# Altium PCB PCB.PcbDoc
Units mil, origin at the board's own origin, x right, y up, seen from the top; angles counter-clockwise.
Board outline 6000 x 4000 mil, 2 copper layers (Top Layer, Bottom Layer); 80 components, 61 nets, 328 pads, 44 vias.
Unrouted connection lines stored in the file: 3.
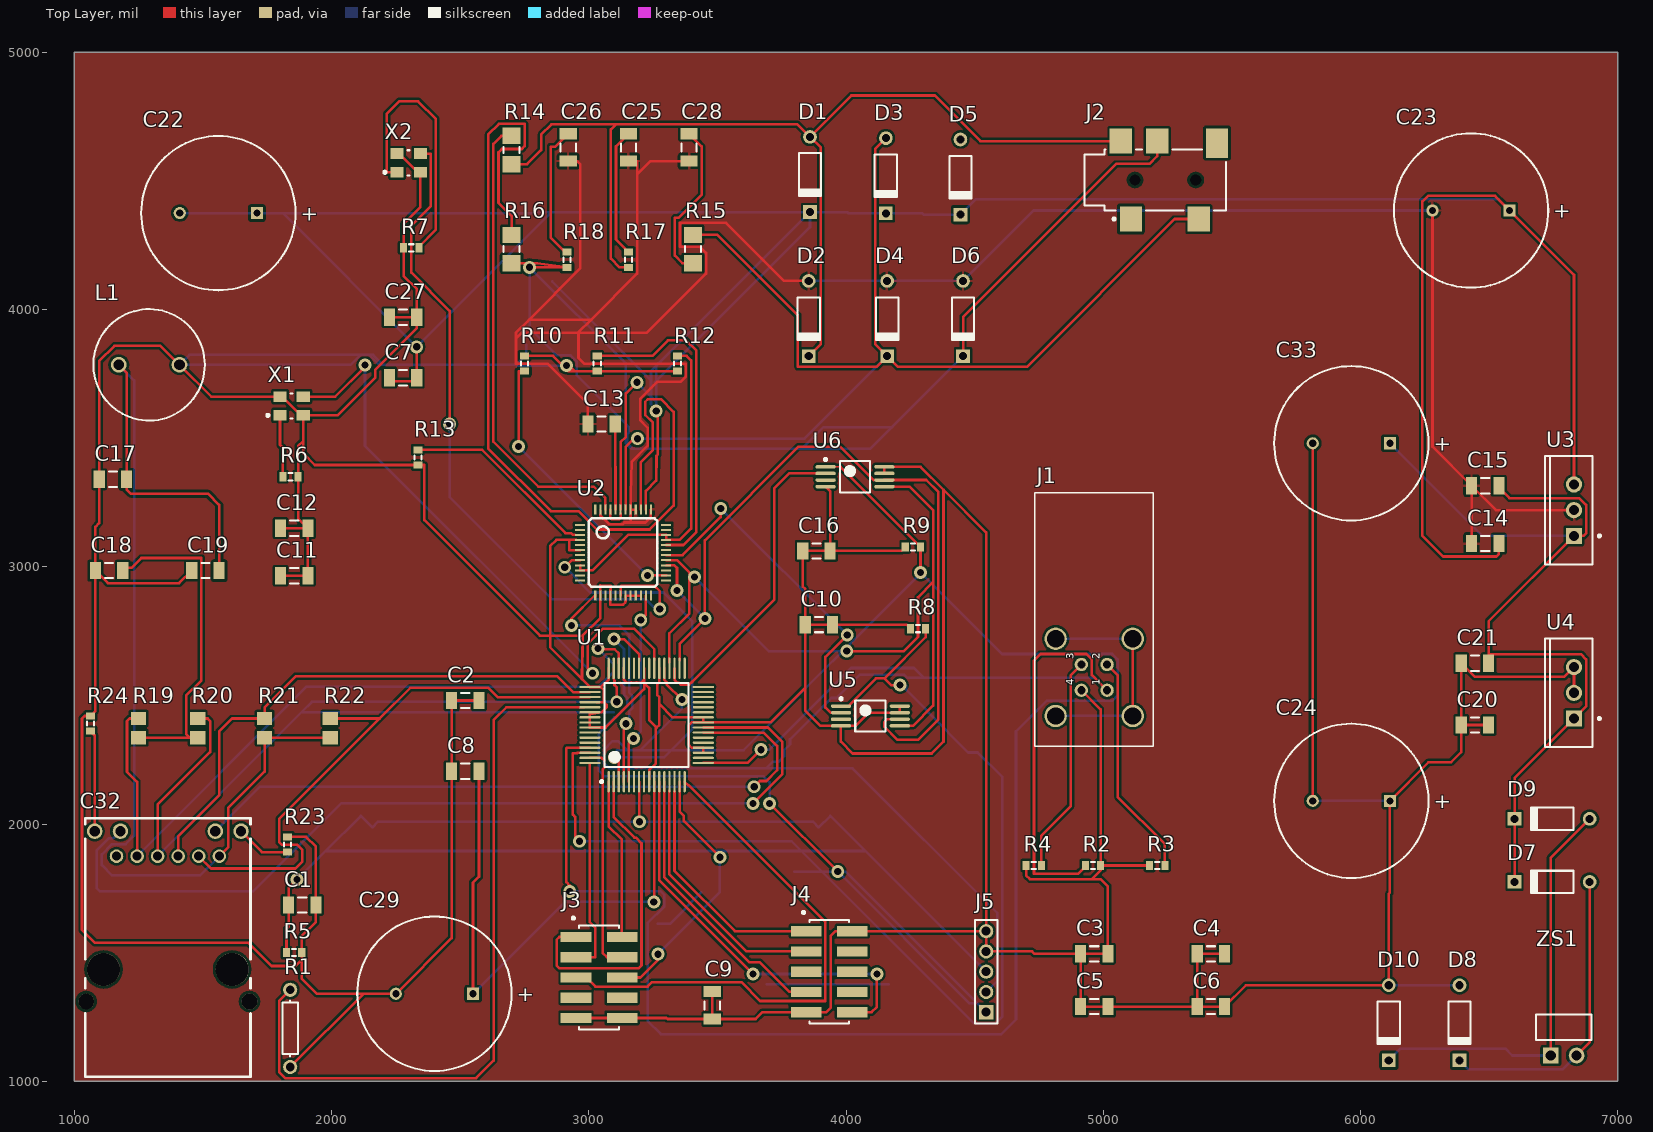
[diagram p0: Top Layer view]
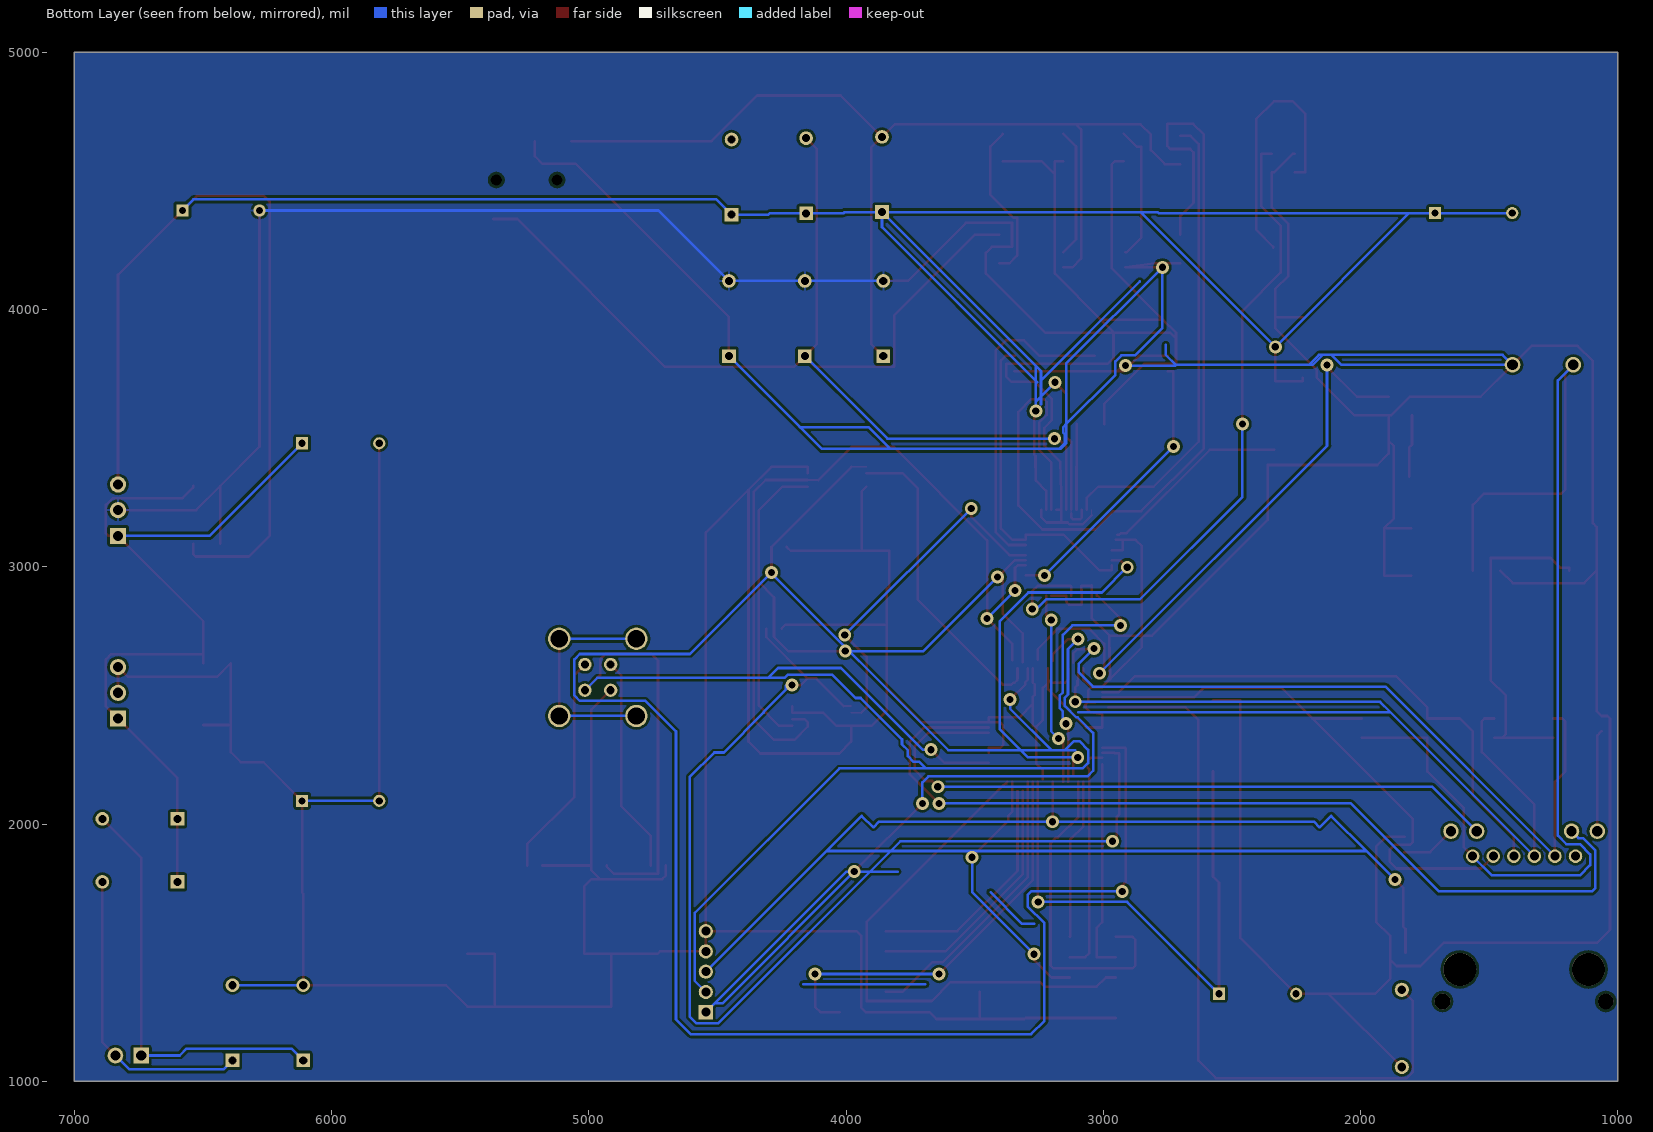
[diagram p1: Bottom Layer view, seen from below]

## Layer stack, top to bottom
Top Solder: solder mask 0.4, Solder Resist, Dk 3.5
Top Layer: signal copper 1.4
Dielectric 1: dielectric 12.6, FR-4, Dk 4.8
Bottom Layer: signal copper 1.4
Bottom Solder: solder mask 0.4, Solder Resist, Dk 3.5

## Board outline
1000,1000 7000,1000 7000,5000 1000,5000

## Design rules (kind name [scope] priority, off if disabled: settings)
Clearance [All] p1: gap=10 ignorepadtopadclearanceinfootprint=FALSE except(0: Arc-Hole Track-Hole SMDPad-Hole THPad-Hole Via-Hole Fill-Hole Poly-Hole Region-Hole Text-Hole)
PolygonConnect [All] p1: connectstyle=Relief reliefconductorwidth=10 reliefentries=4 polygonreliefangle="90 Angle" airgapwidth=10
RoutingVias [All] p1: holewidth=28 width=50 viastyle="Through Hole" minholewidth=28 minwidth=50 maxholewidth=28 maxwidth=50
SMDNeckDown [All] p1: percent=50.000
SolderMaskExpansion [All] p1: expansion=4
Width [All] p1: maxlimit=10 minlimit=10 preferedwidth=10
30 further rules are at their usual default settings.

## Components (designator, comment, footprint, x,y, rotation, side; value= is the part's Value field where it differs from the comment)
C1 "100n" C1206 1886.02,1685 r0 top
C2 "100n" C1206 2520,2480 r0 top
C3 "100n" C1206 4965,1495.22 r0 top
C4 "100n" C1206 5418.51,1495.22 r0 top
C5 "100n" C1206 4965,1290 r0 top
C6 "100n" C1206 5418.51,1290 r0 top
C7 "100n" C1206 2278.35,3735 r0 top
C8 "100n" C1206 2520,2205 r0 top
C9 "100n" C1206 3480,1295 r90 top
C10 "100n" C1206 3895,2775 r0 top
C11 "100n" C1206 1855,2965 r0 top
C12 "100n" C1206 1855,3150 r0 top
C13 "100n" C1206 3050,3555 r0 top
C14 "100n" C1206 6485,3090 r0 top
C15 "100n" C1206 6485,3315 r0 top
C16 "100n" C1206 3885,3061.6 r0 top
C17 "100n" C1206 1150,3340 r0 top
C18 "100n" C1206 1135,2985 r0 top
C19 "100n" C1206 1510,2985 r0 top
C20 "100n" C1206 6445,2385 r0 top
C21 "100n" C1206 6445,2625 r0 top
C22 "10u" RB7.6-15 1560,4375 r0 top
C23 "10u" RB7.6-15 6430,4385 r0 top
C24 "10u" RB7.6-15 5964.58,2090 r0 top
C25 "10n" C1206 3155,4630 r90 top
C26 "10n" C1206 2920,4630 r90 top
C27 "10n" C1206 2278.35,3970 r0 top
C28 "47n" C1206 3390,4630 r90 top
C29 "1u" RB7.6-15 2400,1340 r0 top
C32 "08B0-1X1T-06-F" RJ45 1364.25,1520.35 r180 top
C33 "Cap Pol1" RB7.6-15 5964.58,3480 r0 top value=1000uF
D1 "1N4147" GRZZ0002ZB-A 3860,4525 r90 top
D2 "1N4147" GRZZ0002ZB-A 3855,3965 r90 top
D3 "1N4147" GRZZ0002ZB-A 4155,4520 r90 top
D4 "1N4147" GRZZ0002ZB-A 4160,3965 r90 top
D5 "1N4147" GRZZ0002ZB-A 4445,4515 r90 top
D6 "1N4147" GRZZ0002ZB-A 4455,3965 r90 top
D7 "1N4147" GRZZ0002ZB-A 6745,1775 r0 top
D8 "1N4147" GRZZ0002ZB-A 6385,1227.04 r90 top
D9 "1N4147" GRZZ0002ZB-A 6745,2020 r0 top
D10 "1N4147" GRZZ0002ZB-A 6110,1227.04 r90 top
J1 "KEY" EPC.0B.304.HLNS 4965,2570 r90 top
J2 "HPHONE" PJ-386D 5123.39,4503.43 r0 top
J3 "SD" SMTC-TW-05-07-X-D-500-SM 3040,1403.39 r270 top
J4 "DISP" SMTC-TW-05-07-X-D-500-SM 3935,1425.91 r270 top
J5 "ICSP" SMTC-TW-05-09-X-S-260-100 4545,1268.43 r90 top
L1 "10nH" COIL-RFB1010-2_V 1290.75,3785 r0 top
R1 "2.26K" AXIAL-0.3 1839.25,1205.35 r90 top
R2 "10K" J1-0603 4960,1838.62 r0 top
R3 "10K" J1-0603 5210,1838.62 r0 top
R4 "10K" J1-0603 4730,1838.62 r0 top
R5 "10K" J1-0603 1854.53,1500 r0 top
R6 "10K" J1-0603 1840.47,3350 r0 top
R7 "R5" J1-0603 2309.84,4240 r0 top value=10K
R8 "10K" J1-0603 4280,2759.25 r0 top
R9 "10K" J1-0603 4260,3077.35 r0 top
R10 "10K" J1-0603 2750,3790 r90 top
R11 "10K" J1-0603 3032.91,3790 r90 top
R12 "10K" J1-0603 3345,3790 r90 top
R13 "47K" J1-0603 2335.43,3425 r90 top
R14 "10" 8RB-1206 2700,4620.09 r90 top
R15 "10" 8RB-1206 3405,4235 r90 top
R16 "10" 8RB-1206 2700,4235 r90 top
R17 "20" J1-0603 3155,4193.6 r90 top
R18 "20" J1-0603 2915,4193.6 r90 top
R19 "49.9" 6-0805 1250,2372.6 r90 top
R20 "49.9" 6-0805 1479.67,2372.6 r90 top
R21 "49.9" 6-0805 1740,2372.6 r90 top
R22 "49.9" 6-0805 1995,2372.6 r90 top
R23 "R5" J1-0603 1828.94,1920.47 r90 top value=220
R24 "R5" J1-0603 1062.91,2390.38 r90 top value=220
U1 "PIC18F67J60" TQFP-PT64_M 3225,2385 r90 top
U2 "VS1011" LQFP-48 3133.46,3055 r270 top
U3 "LM2937" NDE0003A 6830,3220 r90 top
U4 "LM2937" NDE0003A 6830,2510 r90 top
U5 "23K256" TSSOP-ST8_M 4095,2420 r0 top
U6 "23K256" TSSOP-ST8_M 4035,3350 r0 top
X1 "25Mhz" AVX-CX3225GB-4_V 1845,3625 r0 top
X2 "24Mhz" AVX-CX3225GB-4_V 2300,4570 r0 top
ZS1 "" SMTC-TSW-102-08-X-S-RA 6740,1100 r0 top

## Footprints (in the part's own frame and the unit in brackets; to place one, negate y for a bottom-side part, rotate by r counter-clockwise, add the part's x,y. Pads: shape width x height; smd on the part's side, far side on the other; paste and mask are expansions set on the pad)
6-0805 [mm] "Chip Resistor; Body 2 x 1.2 mm (LxW typ)"
  rect 1.3x1.5 smd: 1(-0.95,0) 2(0.95,0)
8RB-1206 [mm] "Chip Resistor; Body 3.2 x 1.6 mm (LxW typ)"
  rect 1.6x1.8 smd: 1(-1.4,0) 2(1.4,0)
  silkscreen extent -0.3,-0.8 0.3,0.8
AVX-CX3225GB-4_V [mm] "SMD, 4-Leads, Body 3.2x2.5mm, Height 0.9mm"
  rect 1.3x1.05 smd: 1(-1.15,-0.925) 2(1.15,-0.925) 3(1.15,0.925) 4(-1.15,0.925)
  silkscreen extent -2.47,-1.25 0.1,1.25, body extent -1.6,-1.25 1.6,1.25, height 0.9
AXIAL-0.3 [mm] "Axial Device, Thru-Hole; 2 Leads; 0.3 in Pin Spacing"
  round 1.4 hole 0.85: 1(-3.81,0) 2(3.81,0)
  silkscreen extent -2.77,-0.76 2.77,0.76
C1206 [mm] "Chip Capacitor, Body 3.2x1.6mm, IPC High Density"
  rect 1.1x1.7 smd: 1(-1.35,0) 2(1.35,0)
  silkscreen extent -0.4,-0.75 0.4,0.75, body extent -1.7,-0.9 1.7,0.9, height 1.3
COIL-RFB1010-2_V [mm] "Radial Leaded, 2-Leads, Dia 11mm, Height 11.5mm, Pin Spacing 6mm"
  round 1.55 hole 1.05: 1(-3,0) 2(3,0)
  Mechanical 13 keep-out circle w0.1: c0,0 r5.5
  silkscreen extent -5.5,-5.5 5.5,5.5, body extent -5.5,-5.5 5.5,5.5, height 11.5
EPC.0B.304.HLNS [mil] "Socket, Female, Height 11.7 mm, Through hole"
  round 52 hole 32: 1(-50,-50) 2(50,-50) 3(50,50) 4(-50,50)
  round 87 hole 67: 6(-150,-150) 7(150,-150) 8(150,150) 9(-150,150)
  silkscreen extent -268,-230 717,231, body extent -259,-230 725,230, height 500
GRZZ0002ZB-A [mm] "Diode, Axial; Body 4.2 x 2.2 mm (LxDia. max), Lead Dia. 0.5 mm (nom)"
  rect 1.35x1.35 hole 0.8: 1(-3.71,0)
  round 1.35 hole 0.8: 2(3.71,0)
  silkscreen extent -2.2,-1.1 2.1,1.1, body extent -2.1,-1.1 2.1,1.1, height 2.2
J1-0603 [mm] "Chip Resistor, Body 1.6x0.8mm, IPC High Density"
  rect 0.7x0.9 smd: 1(-0.75,0) 2(0.75,0)
  silkscreen extent -0.2,-0.35 0.2,0.35, body extent -0.85,-0.48 0.85,0.48, height 0.9
LQFP-48 [mm]
  rect 0.2x1 smd paste-25.4 mask-25.4: 1(-2.75,-4.25) 2(-2.25,-4.25) 3(-1.75,-4.25) 4(-1.25,-4.25) 5(-0.75,-4.25) 6(-0.25,-4.25) 7(0.25,-4.25) 8(0.75,-4.25) 9(1.25,-4.25) 10(1.75,-4.25) 11(2.25,-4.25) 12(2.75,-4.25) 25(2.75,4.25) 26(2.25,4.25) 27(1.75,4.25) 28(1.25,4.25) 29(0.75,4.25) 30(0.25,4.25) 31(-0.25,4.25) 33(-1.25,4.25) 34(-1.75,4.25) 35(-2.25,4.25) 36(-2.75,4.25)
  rect 1x0.2 smd paste-25.4 mask-25.4: 13(4.25,-2.75) 14(4.25,-2.25) 15(4.25,-1.75) 16(4.25,-1.25) 17(4.25,-0.75) 18(4.25,-0.25) 19(4.25,0.25) 20(4.25,0.75) 21(4.25,1.25) 22(4.25,1.75) 23(4.25,2.25) 24(4.25,2.75) 37(-4.25,2.75) 38(-4.25,2.25) 39(-4.25,1.75) 40(-4.25,1.25) 41(-4.25,0.75) 42(-4.25,0.25) 43(-4.25,-0.25) 44(-4.25,-0.75) 45(-4.25,-1.25) 46(-4.25,-1.75) 47(-4.25,-2.25) 48(-4.25,-2.75)
  rect 0.2x1 smd mask-25.4: 32(-0.75,4.25)
  silkscreen extent -3.37,-3.38 3.37,3.37
NDE0003A [mm] "FM, 3-Leads, Body 10.7x4.7mm, Pitch 2.54mm"
  rect 1.6x1.6 hole 1: 1(-2.54,0)
  round 1.6 hole 1: 2(0,0) 3(2.54,0)
  silkscreen extent -5.35,-2.63 5.35,2.85, body extent -5.4,-1.9 5.4,2.9, height 19.4
PJ-386D [mm] "Phone Jack, Right Angle, SM, Body 14x6x4.8mm (LxWxH)"
  rect 2.2x2.5 smd: 1(-0.4,-3.85) 2(6.3,-3.85) 3(2.2,3.85) 4(-1.4,3.85)
  rect 2.2x2.9 smd: 10(8.1,3.65)
  round 0.8 hole 1.1 unplated: MH1(0,0) MH2(6,0)
  silkscreen extent -5,-3.97 9,3, body extent -5,-3 9,3, height 4.87
RB7.6-15 [mm] "Polarized Capacitor (Radial); 2 Leads"
  rect 1.2x1.2 hole 0.7: 1(3.81,0)
  round 1.2 hole 0.7: 2(-3.81,0)
  silkscreen extent -7.62,-7.62 7.62,7.62
RJ45 [mm]
  round 1.335 hole 0.89: 1(-5.065,-9) 2(-3.035,-9) 3(-1.005,-9) 4(1.025,-9) 5(3.055,-9) 6(5.085,-9)
  round 1.53 hole 1.02: 7(-7.215,-11.47) 8(-4.675,-11.47) 9(4.695,-11.47) 10(7.235,-11.47)
  round 1.57 hole 1.57 unplated: ""(-8.045,5.34)
  round 3.25 hole 3.25 unplated: ""(-6.335,2.17) ""(6.365,2.17)
  round 1.524 hole 1.57 unplated: ""(8.075,5.34)
  silkscreen extent -8.15,-12.77 8.16,12.76, body extent -8.27,-12.9 8.3,12.9, height 13.42
SMTC-TSW-102-08-X-S-RA [mm] ".025 SQ Post Terminal Strip Assembly, 1x2 Pins, Right Angle, 2.54mm Pitch, Male"
  rect 1.55x1.55 hole 1.02: 1(0,0)
  round 1.55 hole 1.02: 2(2.54,0)
  silkscreen extent -1.46,1.52 4,4.06, body extent -1.27,-0.32 3.81,9.9, height 3.05
SMTC-TW-05-07-X-D-500-SM [mm] "SMT Board Stacking Terminal Strip ASM, 2x5 Pins, Vertical, 2mm Pitch, Male"
  rect 1.02x3.025 smd: 1(-4,-2.272) 2(-4,2.272) 3(-2,-2.272) 4(-2,2.272) 5(0,-2.272) 6(0,2.272) 7(2,-2.272) 8(2,2.272) 9(4,-2.272) 10(4,2.272)
  silkscreen extent -5.98,-2.66 5.12,1.97, body extent -5,-3.37 5,3.37, height 17.35
SMTC-TW-05-09-X-S-260-100 [mm] "Terminal Strip, 1x5 Pins, Vertical, 2mm Pitch, Male"
  rect 1.4x1.4 hole 0.89: 1(0,0)
  round 1.4 hole 0.89: 2(2,0) 3(4,0) 4(6,0) 5(8,0)
  silkscreen extent -1.13,-1.1 9.13,1.1, body extent -1,-0.99 9,0.99, height 9.04
TQFP-PT64_M [mm] "Thin QFP, 64-Leads, Body 10x10mm, Pitch 0.5mm, IPC Low Density"
  oval 2.1x0.224 smd: 1(-5.6,3.75) 2(-5.6,3.25) 3(-5.6,2.75) 4(-5.6,2.25) 5(-5.6,1.75) 6(-5.6,1.25) 7(-5.6,0.75) 8(-5.6,0.25) 9(-5.6,-0.25) 10(-5.6,-0.75) 11(-5.6,-1.25) 12(-5.6,-1.75) 13(-5.6,-2.25) 14(-5.6,-2.75) 15(-5.6,-3.25) 16(-5.6,-3.75) 33(5.6,-3.75) 34(5.6,-3.25) 35(5.6,-2.75) 36(5.6,-2.25) 37(5.6,-1.75) 38(5.6,-1.25) 39(5.6,-0.75) 40(5.6,-0.25) 41(5.6,0.25) 42(5.6,0.75) 43(5.6,1.25) 44(5.6,1.75) 45(5.6,2.25) 46(5.6,2.75) 47(5.6,3.25) 48(5.6,3.75)
  oval 0.224x2.1 smd: 17(-3.75,-5.6) 18(-3.25,-5.6) 19(-2.75,-5.6) 20(-2.25,-5.6) 21(-1.75,-5.6) 22(-1.25,-5.6) 23(-0.75,-5.6) 24(-0.25,-5.6) 25(0.25,-5.6) 26(0.75,-5.6) 27(1.25,-5.6) 28(1.75,-5.6) 29(2.25,-5.6) 30(2.75,-5.6) 31(3.25,-5.6) 32(3.75,-5.6) 49(3.75,5.6) 50(3.25,5.6) 51(2.75,5.6) 52(2.25,5.6) 53(1.75,5.6) 54(1.25,5.6) 55(0.75,5.6) 56(0.25,5.6) 57(-0.25,5.6) 58(-0.75,5.6) 59(-1.25,5.6) 60(-1.75,5.6) 61(-2.25,5.6) 62(-2.75,5.6) 63(-3.25,5.6) 64(-3.75,5.6)
  silkscreen extent -5.72,-4.15 4.15,4.57, body extent -5,-5 5,5, height 1.6
TSSOP-ST8_M [mm] "TSOP, 8-Leads, Body 3x4.4mm, Pitch 0.65mm, IPC Low Density"
  oval 2x0.35 smd: 1(-2.9,0.975) 2(-2.9,0.325) 3(-2.9,-0.325) 4(-2.9,-0.975) 5(2.9,-0.975) 6(2.9,-0.325) 7(2.9,0.325) 8(2.9,0.975)
  silkscreen extent -3.02,-1.55 1.5,1.82, body extent -2.25,-1.55 2.25,1.55, height 1.2

## Part data
C1 C2 C3 C4 C5 C6 C7 C8 C9 C10 C11 C12 C13 C14 C15 C16 C17 C18 C19 C20 C21 C25 C26 C27 C28: library part "Cap Semi", "Capacitor (Semiconductor SIM Model)", LatestRevisionDate=29-May-2009, LatestRevisionNote="IPC-7351 Footprint Added.", PackageDescription="Chip Capacitor", PackageReference=C1206, Published=8-Jun-2000, Publisher="Altium Limited"
C22 C23 C24 C29: library part "Cap Pol1", "Polarized Capacitor (Radial)", LatestRevisionDate=17-Jul-2002, LatestRevisionNote="Re-released for DXP Platform.", PackageDescription="Polarized Capacitor (Radial); 2 Leads", PackageReference=RB7.6-15, Published=8-Jun-2000, Publisher="Altium Limited"
C32: Supplier Part Number 1=507-1445-ND, HELPURL=http://belfuse.com/pdfs/08B0-1X1T-06-F.pdf, Supplier 1=Digikey
C33: "Polarized Capacitor (Radial)", LatestRevisionDate=17-Jul-2002, LatestRevisionNote="Re-released for DXP Platform.", PackageDescription="Polarized Capacitor (Radial); 2 Leads", PackageReference=RB7.6-15, Published=8-Jun-2000, Publisher="Altium Limited"
D1 D2 D3 D4 D5 D6 D7 D8 D9 D10: library part 1N4148, "Silicon Epitaxial Planar Diode for Various Detector, Modulator, Demodulator", Code_JEITA=SC-40, ComponentLink1Description="Manufacturer Link", ComponentLink1URL=http://sg.renesas.com/fmwk.jsp?cnt=diode_landing.jsp&fp=/products/discrete/diodes/, ComponentLink2Description=Datasheet, ComponentLink2URL=http://documentation.renesas.com/eng/products/diode/rej03g0556_1n4148.pdf, ComponentLink3Description="Packaging Specification", ComponentLink3URL=http://sg.renesas.com/media/products/common_info/package/pdf/diode/code/grzz0002zb_a.pdf, DatasheetVersion="Rev.5.00, Jul-2006", PackageDescription="Diode, Axial; Body 4.2 x 2.0 mm (LxDia.), Lead Dia. 0.5 mm (nom)", PackageReference=GRZZ0002ZB-A, PackageVersion=Aug-2005, Published=12-Feb-2010, Publisher="Altium Limited"
J1: library part CMP-1505-00274-1, "Elbow receptacle for printed circuit (solder or screw fixing), Key (C), 0B series, Multipole Type with 4 Contacts", Manufacturer=LEMO, PartNumber=EPC.0B.304.HLNS, Rated Current(A)=6, AWG=24, ComponentLink1Description="Manufacturer URL", ComponentLink1URL=http://www.lemo.com, ComponentLink2Description=Datasheet, ComponentLink2URL=http://intra.lemo.ch/catalog/ROW/UK_English/unipole_multipole.pdf, Contact Diameter="0.7 mm", DatasheetVersion=Jun-14, Number of contacts=4, PackageDescription="Elbow receptacle for printed circuit (solder or screw fixing), Key(C) for Printed Circuit", PackageReference=EPC.0B.304.HLNS
J2: library part TSH-3864D, "Phone Jack, PJ-386D Series, Right Angle, SM, 4-Conductor Open Circuit", ComponentLink1Description="Manufacturer Link", ComponentLink1URL=http://www.contactswitch.com/, ComponentLink2Description=Datasheet, ComponentLink2URL=http://www.contactswitch.com/uploads/product/pdf_file_193.pdf, DatasheetVersion="revA, 2006", DrillSize="Corresponds to nominal value.", PackageDescription="PJ-386D Series Phone Jack, Right Angle, SM, Body 14 x 6 x 4.8 mm (LxWxH)", PackageReference=PJ-386D, PackageVersion="revA, 2006", PCB_Layout="Complies with manufacturer's recommendation.", Published=30-May-2008, Publisher="Altium Limited"
J3 J4: library part CMP-1029-00393-1, "SMT Board Stacker, Vertical, -55 to 125 degC, 2 mm Pitch, 10-Pin, Male, RoHS", Manufacturer=Samtec, PartNumber=TW-05-07-F-D-500-SM, Temperature Range="-55 to 125 degC", ComponentLink1Description="Manufacturer URL", ComponentLink1URL=http://www.samtec.com, ComponentLink2Description=Datasheet, ComponentLink2URL=http://d2a072wq521u33.cloudfront.net/catalog_english//TW_SM.PDF, ComponentLink3Description="Package Specification", ComponentLink3URL=http://www.samtec.com/documents/webfiles/cpdf/TW-XX-XX-XXX-X-XXX-SM-XXX-XX-MKT1.pdf, DatasheetVersion=F-214, Mounting Technology="Surface Mount", Orientation=Vertical, PackageDescription="High Temp 2mm SMT Board Stacking Terminal Strip ASM", PackageReference=TW-05-07-X-D-500-SM, PackageVersion="CL, 3/1993", Pitch="2 mm", RoHS=True
J5: library part CMP-1029-00402-1, "Through-Hole Board Stacker, Vertical, -55 to 125 degC, 2 mm Pitch, 5-Pin, Male, RoHS", Manufacturer=Samtec, PartNumber=TW-05-09-F-S-260-100, Temperature Range="-55 to 125 degC", ComponentLink1Description="Manufacturer URL", ComponentLink1URL=http://www.samtec.com, ComponentLink2Description=Datasheet, ComponentLink2URL=http://d2a072wq521u33.cloudfront.net/catalog_english//TW_TH.PDF, ComponentLink3Description="Package Specification", ComponentLink3URL=http://www.samtec.com/documents/webfiles/cpdf/TW-XX-XX-X-X-XXX-XXX-XXX-XX-MKT2.pdf, DatasheetVersion=F-214, Mounting Technology=Through-hole, Orientation=Vertical, PackageDescription="High Temp 2mm Terminal Strip(Board Stacking)", PackageReference=TW-05-09-X-S-260-100, PackageVersion="BF, 6/1998", Pitch="2 mm", RoHS=True
L1: library part CMP-0899-00020-1, "Power Inductor, 56 uH +/- 10%, 2.6 A, -40 to 125 degC, 2-Pin Radial Leaded, Dia 11 mm, RoHS, Tray", Ambient Temperature Range="-40 to 125 degC", Inductance="56 uH", Manufacturer=Coilcraft, PartNumber=RFB1010-560L, Tolerance=10%, ComponentLink1Description="Manufacturer URL", ComponentLink1URL=http://www.coilcraft.com/, ComponentLink2Description=Datasheet, ComponentLink2URL=http://www.coilcraft.com/pdfs/rfb.pdf, DatasheetVersion=Sep-13, DCR="0.09 Ohm Max.", Irms="3.2 A @40 degC", Isat="2.6 A", Mounting Technology="Through Hole", PackageDescription="2-Pin Radial Leaded, Dia 11 mm, Height 11.5 mm, Radial 6 mm", PackageReference=RFB1010-2, Packing=Tray, RoHS=TRUE, SRF="8.6 MHz"
R1: library part Res1, "Resistor", LatestRevisionDate=17-Jul-2002, LatestRevisionNote="Re-released for DXP Platform.", PackageDescription="Axial Device, Thru-Hole; 2 Leads; 0.3 in Pin Spacing", PackageReference=AXIAL-0.3, Published=8-Jun-2000, Publisher="Altium Limited"
R2 R3 R4 R5 R6 R7 R8 R9 R10 R11 R12 R13 R17 R18 R23 R24: library part Res3, "Resistor", LatestRevisionDate=29-May-2009, LatestRevisionNote="IPC-7351 Footprint Added.", PackageDescription="Chip Resistor", PackageReference=J1-0603, Published=8-Jun-2000, Publisher="Altium Limited"
R14 R15 R16: library part ERJ8BQ, "Low Ohmic Value Thick Film Chip Resistor, 0.22 Ohm to 9.1 Ohm Range, 1%, 2% and 5% Tolerance, 1206 Size, 0.33 W", PackageDocument=Mar-2003, Code_IPC="3216 [1206]", ComponentLink1Description="Manufacturer Link", ComponentLink1URL=http://www.panasonic.com/industrial/components/resistive_products.htm, ComponentLink2Description=Datasheet, ComponentLink2URL=http://www.panasonic.com/industrial/components/pdf/AOA0000CE3.pdf, LatestRevisionDate=19-Mar-2004, LatestRevisionNote="Silkscreen size reduced.", PackageReference=8RB-1206, Published=17-Dec-2003, Publisher="Altium Limited"
R19 R20 R21 R22: library part ERJ6BQ, "Low Ohmic Value Thick Film Chip Resistor, 0.22 Ohm to 9.1 Ohm Range, 1%, 2% and 5% Tolerance, 0805 Size, 0.25 W", PackageDocument=Mar-2003, Code_IPC="2012 [0805]", ComponentLink1Description="Manufacturer Link", ComponentLink1URL=http://www.panasonic.com/industrial/components/resistive_products.htm, ComponentLink2Description=Datasheet, ComponentLink2URL=http://www.panasonic.com/industrial/components/pdf/AOA0000CE3.pdf, LatestRevisionDate=19-Mar-2004, LatestRevisionNote="Silkscreen size reduced.", PackageReference=6-0805, Published=17-Dec-2003, Publisher="Altium Limited"
U1: library part CMP-0116-00618-1, "High Performance, 1-Mbit Flash Microcontroller with Ethernet, 128K Flash, 64-Pin TQFP, Industrial Temperature Range, Tape and Reel", Code_JEDEC=MS-026, DatasheetVersion="revE, Oct-2009", PackageDescription="64-Lead Thin Plastic Quad Flat Pack (PT) - 10x10x1mm Body, 2.00mm [TQFP]", PackageReference=TQFP-PT64, PackageVersion="revBB, Aug-2009"
U3 U4: library part CMP-0062-02520-3, "400mA and 500mA Voltage Regulator, 3-pin TO-220, Pb-Free", Manufacturer="Texas Instruments", PackageTopMarking=NSUZXYTTE#*LM2937ET*-3.3, PowerWise=N, ComponentLink1Description="Datasheet URL", ComponentLink1URL=http://www.ti.com/general/docs/lit/getliterature.tsp?genericPartNumber=LM2937-3.3&fileType=pdf, CompType="LDO IC", PackageDescription="TO-220, Molded, 3 Lead, Straight", PackageReference=NDE0003A, PinCount=3, RoHS=Y
U5 U6: library part CMP-0163-00021-1, "256K, 32768x8-bit, 3.6V SPI Serial SRAM, 8-Pin TSSOP, Extended TemperatureTape and Reel", Code_JEDEC=MO-153, DatasheetVersion="revD, Apr-2009", PackageDescription="8-Lead Plastic Thin Shrink Small Outline (ST) - 4.4mm Body [TSSOP]", PackageReference=TSSOP-ST8, PackageVersion="revBB, Aug-2009"
X1 X2: library part CMP-0614-00001-1, "Crystal Unit, 8 pF, 25000 kHz, -10 to 70 degC, 4-Pin 3.2 x 2.5 x 0.8 mm SMD, RoHS, Tape and Reel", Frequency="25000 kHz", Frequency Tolerance="+/- 20 x 10^(-6)", Load Capacitance="8 pF", Manufacturer=Kyocera, Operationg Temperature="-10 to 70 degC", PartNumber=CX3225GB25000D0HEQCC, ComponentLink1Description="Manufacturer URL", ComponentLink1URL=http://global.kyocera.com/, ComponentLink2Description=Datasheet, ComponentLink2URL=http://global.kyocera.com/prdct/electro/pdf/xtal/cx3225gb_cs_e.pdf, ComponentLink3Description="Package Specification", ComponentLink3URL=http://global.kyocera.com/prdct/electro/pdf/xtal/cx3225gb_cs_e.pdf, DatasheetVersion=Sep-13, Mounting Technology="Surface Mount", PackageDescription="4-Pin SMT, Body 3.2 x 2.5 mm, Height 0.9 mm", PackageReference=CX3225GB-4, PackageVersion=Sep-13, Packing="Tape and Reel", RoHS=TRUE, Series=CX3225GB
ZS1: library part CMP-1024-00320-1, Manufacturer=Samtec, PartNumber=TSW-102-08-G-S-RA, Temperature Range="-55 to 125 degC", ComponentLink1Description="Manufacturer URL", ComponentLink1URL=http://www.samtec.com, ComponentLink2Description=Datasheet, ComponentLink2URL=http://www.samtec.com/documents/webfiles/pdf/TSW_TH.PDF, ComponentLink3Description="Package Specification", ComponentLink3URL=http://www.samtec.com/documents/webfiles/cpdf/TSW-XXX-XX-XXX-X-XX-XXX-MKT.pdf, DatasheetVersion=F-214, Mounting Technology=Through-hole, Orientation="Right Angle", PackageDescription=".025[0.64] SQ. Post Terminal Strip Assembly", PackageReference=TSW-102-08-X-S-RA, PackageVersion="DM, 8/1988", Pitch="2.54 mm", RoHS=True
U2: HELPURL=http://www.vlsi.fi/fileadmin/datasheets/vs1011.pdf

## Via types
v1: diameter 50, hole 28, Top Layer to Bottom Layer, 44 vias

## Nets (pads, with @x,y where several pads share a name; then routed paths per layer and width w, separated by ;. In a path a pad name is that pad's centre, name@x,y a point inside that pad or via, vN(x,y) a via of type N, cw(c..) or ccw(c..) an arc to the next point about the centre after c; other vN are vias at no path point)
+3.3VA: C7.1 C7.2 C14.2 C22.1 C22.2 C23.1 D1.1 D3.1 D5.1 U2.38 U2.43 U2.45 U3.3 | length 13490.8
  Top Layer w3.94: U2.43@3123.62,3207 U2.43
  Top Layer w10: C7.1 2225.2,3720.91 2331.5,3720.91 C7.2 2331.5,3854.5 v1(2331,3855) ; U2.45 3084.25,3189.75 3089.03,3184.97 3117.92,3184.97 3123.62,3190.67 U2.43@3123.62,3207 ; U2.43 3123.62,3484.35 3144,3504.73 3144,3674 v1(3187,3717) ; U2.38 3222.05,3295.4 3262,3335.35 ; v1(3262,3605.35) 3269,3598.35 3269,3436.84 3264,3431.84 ; C14.2 6538.15,3050 6528.15,3040 6321,3040 6241,3120 6241,4420 6263,4442 6523,4442 C23.1 6830,4135 U3.3 ; 3262,3335.35 3264,3431.84 ; 3262,3335.35 3262,3429.84 3264,3431.84
  Bottom Layer w10: C22.2 C22.1 1811,4375 ; v1(3187,3717) 3242,3662 ; 3242,3632 3242,3662 ; 3257,3717 3262,3722 ; v1(3262,3605.35) 3262,3642 ; C23.1 6537,4428 4504.06,4428 D5.1 4302,4368.94 4297,4373.94 D3.1 4010,4373.94 4005,4378.94 D1.1 ; 1811,4375 v1(2331,3855) 2854.94,4378.94 ; 1811,4375 2785,4375 2788.94,4378.94 2854.94,4378.94 ; 2854.94,4378.94 D1.1 ; 3242,3662 3242,3760.94 3262,3780.94 ; 3242,3662 3262,3642 ; 3262,3642 3262,3722 ; 3262,3722 3860,4320 D1.1 ; 3262,3722 3262,3780.94 ; 3262,3780.94 D1.1
+3.3VD: C1.2 C2.1 C2.2 C3.1 C3.2 C4.1 C4.2 C5.1 C5.2 C6.1 C6.2 C8.1 C9.1 C9.2 C10.1 C10.2 C11.1 C11.2 C12.1 C12.2 C16.1 C16.2 C17.1 C18.1 C19.1 C20.1 C20.2 C21.1 C24.1 C24.2 C27.1 C27.2 C29.2 C33.2 D8.2 D10.2 J1.4 J3.9 J3.10 J4.2 J4.9 J5.4 J5.5 L1.2 R1.1 R2.2 R3.1 R4.1 R5.2 R6.2 R7.1 R8.1 R9.1 R10.2 R11.1 R12.1 R13.1 R23.2 R24.2 U1.9 U1.19 U1.20 U1.25 U1.26 U1.38 U1.41 U1.45 U1.48 U1.49 U1.52 U1.54 U1.55 U1.56 U1.57 U2.4 U2.6 U2.14 U2.16 U2.19 U2.20 U2.21 U2.22 U4.2 U4.3 U5.4 U5.7 U5.8 U6.4 U6.7 U6.8 X1.2 X1.4 X2.2 X2.4 | length 33820.4
  Top Layer w6.89: U5.4@3980,2381.61 U5.4
  Top Layer w10: C19.1 1407.85,2936 1130.85,2936 C18.1 ; C11.1 C11.2 C12.2 ; C12.1 C12.2 ; R23.2 1901,1950 1939.17,1911.82 C1.2 1939.17,1619.12 1884.06,1564 R5.2 1884.06,1472.06 ; R1.1 2123.9,1340 ; C27.1 C27.2 ; X2.4 2263,4606.42 2335.83,4533.58 X2.2 2345.28,4398 2280.31,4333.04 R7.1 2280.31,4130.18 2331.5,4079 C27.2 ; C2.2 C2.1 C8.1 2466.85,1556.85 C29.2 2123.9,1340 ; R10.2 2861,3819.53 2920.05,3760.47 2944.58,3760.47 ; v1(2913,3782) 2923.05,3782 2944.58,3760.47 ; 2924,3103.9 2924.16,3103.74 2924.16,3064.84 U2.6 ; J3.9 J3.10 3302,1245.91 3306.06,1241.85 C9.1 ; U2.4@2951,3104.21 2874.21,3104.21 2850,3080 2850,2732 ; U1.52@3032,2473.58 3059,2473.58 ; U1.48 3077.36,2560 3046.36,2532.64 ; U1.45 3136.42,2560 3137.2,2560 3148.06,2549.13 3164.14,2549.13 3165.95,2550.94 3167.75,2549.13 3183.83,2549.13 3185.63,2550.94 3187.43,2549.13 3203.51,2549.13 3214.38,2560 3215.16,2560 ; U2.22 U2.21 U2.20 U2.19 3143.31,2865.31 3142.56,2864.56 3142.56,2861.78 3133.77,2852.99 3130.99,2852.99 3130,2852 3084.25,2852 U2.16 3084.25,2910 3085,2909.25 3085,2926 3047,2926 3045,2928 3045,2910.12 3044.88,2910 U2.14 3044.88,2800.88 2976,2732 ; U1.41 3215.16,2560 ; U1.9@3234.84,2175 3234.84,2209.9 3261,2236.05 3261,2372.16 3263.84,2375 ; U1.38 3274.21,2550.71 3266,2542.49 3266,2502.33 3274.21,2494.12 3274.21,2465.82 ; R12.1 3033,3760.47 R11.1 2944.58,3760.47 ; U1.19 U1.20 3400,2296.42 3389,2307.42 3389,2383.84 3400,2394.84 U1.25 ; C9.2 C9.1 ; U6.4 3938.15,3294.29 C16.2 ; U5.4 4037.82,2381.61 4089,2432.79 U5.7 U5.8 ; U6.7 U6.8 4290,3388.38 4379,3299.38 ; R9.1 4214.73,3061.6 C16.2 ; R8.1 4234.72,2775 C10.2 C10.1 ; R4.1 4700.47,1800 4714.57,1785.9 4955.43,1785.9 ; J1.4 4989.53,2445.47 R2.2 ; R3.1 R2.2 ; C4.2 C4.1 C6.1 ; C24.2 C33.2 ; C20.2 C20.1 ; U4.2 U4.3 6792,2572 6444.85,2572 C21.1 C20.1 ; C18.1 1081.85,3155 1096.85,3170 C17.1 1096.85,3800 1155.85,3859 1334.86,3859 L1.2 1532.44,3661.42 X1.4 1808,3661.42 1880.83,3588.58 X1.2 ; C18.1 1081.85,2438.84 R24.2 1040,2419.91 1030,2409.91 1030,1588 1080,1538 1677,1538 1767,1448 1860,1448 1884.06,1472.06 ; 1884.06,1472.06 1884.06,1400 1944.06,1340 2123.9,1340 ; 1890.28,3489.28 1890.28,3440 1934.8,3395.47 R13.1 2361,3395.47 2361,3181 2810,2732 2850,2732 ; 1890.28,3489.28 1870,3469 R6.2 1870,3188.15 C12.2 ; 1890.28,3489.28 X1.2 ; X1.2 2023.31,3588.58 2170.14,3735.41 2170.14,3766.14 2331.5,3927.5 C27.2 ; 2850,2732 2976,2732 ; 2850,2732 2850,2687.17 2973.66,2563.5 ; 2973.66,2563.5 2976,2732 ; 2973.66,2563.5 U1.49 3046.36,2532.64 ; 3046.36,2532.64 3059,2520 3059,2473.58 ; 3059,2473.58 3069,2463.58 3069,2453.21 3050,2434.21 3005.93,2426.34 3004,2426 U1.55 U1.56 U1.57 3065.72,2375.16 3215.16,2524.59 3215.16,2549 ; 3215.16,2549 3234.84,2529.32 3234.84,2404 3263.84,2375 ; 3215.16,2549 3215.16,2560 ; 3263.84,2375 3274.21,2385.37 3274.21,2465.82 ; 3274.21,2465.82 3325.51,2414.53 U1.26 U1.25 ; U1.25 3706,2394.84 3841.85,2530.69 ; C9.1 3649,1241.85 3675.58,1268.43 J4.9 3923.43,1268.43 3940.08,1285.08 3940.08,1565.08 3958.39,1583.39 J4.2 J5.5 ; 3841.85,2530.69 C10.1 ; 3841.85,2530.69 3841.85,2440 3900.24,2381.61 3980,2381.61 3980,2320 4026,2274 4333,2274 4379,2320 4379,3299.38 ; C10.1 3841.85,2913 3831.85,2923 C16.1 C16.2 ; 4379,3299.38 4545,3133.38 J5.5 ; J5.5 J5.4 4723,1504.65 4732.43,1495.22 C3.1 ; C3.1 C5.1 C5.2 C6.1 ; C3.1 C3.2 5018.15,1757.28 4989.53,1785.9 4955.43,1785.9 ; 4955.43,1785.9 4989.53,1820 R2.2 ; C6.1 C6.2 5554.76,1373.1 D10.2 6110,1729 6114.58,1733.58 C24.1 6264.58,2240 6351.85,2240 6391.85,2280 C20.1
  Bottom Layer w10: 2757,3862 2757,3824 2718,3785 ; v1(2913,3782) 2721,3782 2718,3785 ; C24.2 C24.1 ; D10.2 D8.2 ; 2113.43,3824 2146.57,3824 ; 2113.43,3824 1447.86,3824 L1.2 2074.43,3785 2113.43,3824 ; 2146.57,3824 2161.54,3824 2200.54,3785 ; 2146.57,3824 2185.57,3785 2200.54,3785 ; 2200.54,3785 2718,3785
AGND: C13.1 C14.1 C15.1 C23.2 C25.1 C26.1 C28.1 D2.2 D4.2 D6.2 U2.37 U2.40 U2.41 U2.47 U3.2 | length 10269.1
  Top Layer w3.94: 3044.88,3200 U2.47
  Top Layer w10: C26.1 2955,4576.85 2967.72,4564.13 2967.72,4160.72 2767,3960 ; C13.1 2996.85,3632.15 2839,3790 2717,3790 2717,3887 ; 3044.88,3200 3079.91,3164.97 3131.27,3164.97 3138.3,3172 3163,3172 ; C25.1 3188,4576.85 3188,4524.85 ; U2.40 U2.41 ; U2.37 3241.73,3193.73 3220,3172 3163,3172 ; C28.1 3272,4576.85 3240,4576.85 3188,4524.85 ; D2.2 3759,4111.06 3533.45,4336.62 3354.57,4336.62 3354.57,4243.62 3432.38,4243.62 3456,4220 3456,4140 3226,3910 2960,3910 ; C23.2 6280,3466.85 C15.1 ; C14.1 C15.1 ; U3.2 6526.85,3220 C15.1 ; 2717,3887 2717,3910 2767,3960 ; 2717,3887 2740,3910 2960,3910 ; 2767,3960 3008,3960 ; 2960,3910 2960,3912 3008,3960 ; 2960,3910 2960,3812 2982,3790 3377.72,3790 3377.72,3740 3357.72,3720 3268,3720 3199.54,3651.54 3199.54,3569.93 3229,3540.47 3229,3470.47 3166.63,3408.11 3162.99,3283.63 U2.41 ; 3008,3960 3188,4140 3188,4524.85 ; 3162.99,3172.01 U2.41
  Bottom Layer w10: D2.2 D4.2 D6.2 4728.94,4385 C23.2
CS1: R8.2 U1.62 U5.1 | length 4388.5
  Top Layer w6.89: U5.1 U5.1@4009,2458.39
  Top Layer w10: 2955,2275 2938,2275 2938,2036.5 2947,2027.5 2947,1950 v1(2964,1933) ; 2955,2276.73 U1.62 ; U5.1@4009,2458.39 4116.61,2566 4149.53,2566 ; v1(4210,2540) 4175.53,2540 4149.53,2566 ; R8.2 4309.53,2726 4149.53,2566
  Bottom Layer w10: v1(2964,1933) 3789,1933 4497,1225 4581,1225 4608,1252 4608,2182 4512,2278 4475,2278 4320,2433 4320,2436 4234,2522 4234,2538 v1@4224,2548
CS2: R9.2 U1.61 U6.1 | length 7703.1
  Top Layer w6.89: U6.1 3978.49,3388.38
  Top Layer w10: v1(2926,1738) 2926,1761 2913,1774 2913,2295 2914.42,2296.42 U1.61 ; 3978.49,3388.38 R9.2 4289.53,2978.47 v1(4290,2978)
  Bottom Layer w10: v1(2926,1738) 3280,1738 3294,1724 3294,1680 3229,1615 3229,1234 3280,1183 4604,1183 4661,1240 4661,2360 4780,2479 5035,2479 5056,2500 5056,2640 5035,2661 4607,2661 v1(4290,2978) ; 3109,2287 3602.53,2287 v1@4289.53,2974
D_CLK: J4.1 U1.14 | length 919.6
  Top Layer w10: U1.14@3333.27,2128 3333.27,1817.73 3567.61,1583.39 J4.1
D_DATA: J4.3 U1.13 | length 981.8
  Top Layer w10: U1.13@3313.58,2130 3313.58,1804.19 3613.12,1504.65 J4.3
D_RES: J4.7 U1.12 | length 1108.1
  Top Layer w10: U1.12 3293.9,1792.46 3624.36,1462 3665.17,1462 3780,1347.17 J4.7
D_SC: J4.10 U1.11 | length 2086.6
  Top Layer w10: U1.11 3274.21,1780.82 v1(3638.03,1417) ; J4.10 4100,1268.43 4120,1288.43 v1(4120,1417)
  Bottom Layer w10: v1(3638.03,1417) v1(4120,1417) ; 3692,1377 4166,1377
DREQ: U1.3 U2.8 | length 1494.1
  Top Layer w4.41: v1(3099,2259) 3116.73,2241.27
  Top Layer w10: v1(2906.76,2998.24) 2934,3025.47 U2.8 ; U1.3@3116.73,2194 3116.73,2241.27
  Bottom Layer w10: v1(2906.76,2998.24) 3005,2900 3291,2900 3402,2789 3402,2368 3293,2259 v1(3099,2259)
GBUF: D3.2 D4.1 J2.2 R15.2 U2.42 | length 4859.1
  Top Layer w10: U2.42 3143.31,3465.31 3176,3498 v1(3189,3498) ; R15.2 3499.92,4290.12 3813,3977.03 3813,3777 4118.06,3777 D4.1 ; D3.2 4113,4624.06 4113,3865.94 D4.1 ; J2.2 5277.85,4351.85 4703,3777 4201.94,3777 D4.1
  Bottom Layer w10: v1(3189,3498) 3839.06,3498 D4.1
GPIO: R12.2 U2.9 U2.10 U2.33 U2.34 | length 1259.7
  Top Layer w10: U2.9 U2.10 3015.2,2986.1 3153,3123.9 U2.34 U2.33 3353.43,3104.21 3397.72,3148.5 3397.72,3801.81 3380,3819.53 R12.2
LEDA: C32.9 U1.24 | length 3584.5
  Top Layer w10: U1.24 3696.84,2375.16 3752,2320 3752,2193 v1(3639,2080)
  Bottom Layer w10: C32.9 1152.71,1945.23 1135.61,1945.23 1086.95,1896.57 1086.95,1751.05 1100,1738 1695,1738 2037,2080 v1(3639,2080)
LEDB: C32.8 U1.23 | length 2684.4
  Top Layer w10: U1.23 3680,2355.47 3732,2303.47 3732,2209 3690.25,2167.25 3665.25,2167.25 v1(3643,2145)
  Bottom Layer w10: C32.8 1721.38,2145 v1(3643,2145)
LEFT: R14.2 U2.46 | length 2448.7
  Top Layer w10: R14.2 2660,4675.21 2629,4644.21 2629,3486 2804,3311 3020,3311 3064.57,3266.43 U2.46
  Bottom Layer w10: 2858,4109 3242,3725 3242,3632
MCLR: C1.1 J5.3 R5.1 U1.7 | length 5644.3
  Top Layer w10: R5.1 1825,1592 1832.87,1599.87 C1.1 1832.87,1750.87 v1(1866,1784) ; U1.7 3195.47,2033.53 3197,2032 v1(3197,2009)
  Bottom Layer w10: v1(1866,1784) 1977,1895 ; J5.3 4075.91,1895 ; 1977,1895 4075.91,1895 ; 1977,1895 2114,2032 2159,1987 2181,2009 v1(3197,2009) 3871.91,2009 3893.91,1987 3938.91,2032 4075.91,1895
NC: R10.1 U2.26 | length 1097
  Top Layer w10: v1(2727,3468) 2727,3760.47 R10.1 ; v1(3228.58,2966.42) U2.26
  Bottom Layer w10: v1(2727,3468) v1(3228.58,2966.42)
NetC8_2: C8.2 C29.1 U1.10 | length 2193.6
  Top Layer w10: C29.1 2550,1772 2573.15,1795.15 C8.2 ; v1(3253,1697) 3254.53,1698.53 U1.10
  Bottom Layer w10: C29.1 2907,1697 v1(3253,1697)
NetC15_2: C15.2 C21.2 C33.1 D7.1 D9.1 U3.1 U4.1 | length 3399.5
  Top Layer w10: C21.2 6498.15,2660.15 ; C15.2 6538.15,3308 6579.15,3267 6850,3267 6877,3240 6877,3130 6867,3120 U3.1 6498.15,2788.15 6498.15,2660.15 ; D7.1 D9.1 6598.94,2178.94 U4.1 6877,2457 6877,2640 6856.85,2660.15 6498.15,2660.15
  Bottom Layer w10: C33.1 6474.58,3120 U3.1
NetC17_2: C17.2 C19.2 C32.1 L1.1 R21.1 R22.1 | length 4484
  Top Layer w10: L1.1 1203.15,3754.49 C17.2 1203.15,3300 1219.15,3284 1520,3284 1563.15,3240.85 C19.2 ; C32.1 1598,1909.02 1598,2062 1740,2204 R21.1 R22.1
  Bottom Layer w10: L1.1 1233,3724.64 1233,1955 1200,1922 1147,1922 1106.95,1881.95 1106.95,1840 1146.95,1800 1488.98,1800 C32.1
NetC18_2: C18.2 R19.1 R20.1 | length 1292.2
  Top Layer w10: C18.2 1188.15,2997 1224,2997 1261,3034 1494,3034 1494,2558 1435,2499 1435,2350 1449.8,2335.2 ; R19.1 1449.8,2335.2 ; R20.1 1449.8,2335.2
NetC25_2: C25.2 R17.2 | length 500.6
  Top Layer w10: R17.2 3106,4272.13 3106,4634.15 C25.2
NetC26_2: C26.2 R18.2 | length 529.9
  Top Layer w10: R18.2 2907.81,4223.13 2851.53,4279.4 2851.53,4633.51 2870.36,4633.51 C26.2
NetC28_2: C28.2 R15.1 | length 628.8
  Top Layer w10: C28.2 3439,4634.15 3439,4446 3349.62,4356.62 3334.57,4356.62 3334.57,4209.43 3364.12,4179.88 R15.1
NetC32_7: C32.7 R23.1 | length 214.2
  Top Layer w10: C32.7 1729.29,1890.95 R23.1
NetC32_10: C32.10 R24.1 | length 395.8
  Top Layer w10: R24.1 1079.41,2344.35 C32.10
NetD1_2: D1.2 D2.1 J2.4 R14.1 R17.1 | length 4130.2
  Top Layer w10: R14.1 2760,4564.98 2815,4619.98 2815,4680 2855,4720 3106,4720 ; R17.1 3120,4164.07 3086,4198.07 3086,4700 3106,4720 ; D2.1 3902,3865.94 3902,4629.06 D1.2 ; J2.4 4523,4655 4346,4832 4020.94,4832 D1.2 ; 3106,4720 3811.06,4720 D1.2
NetD6_1: D6.1 J2.3 R16.1 R18.1 | length 5206.5
  Top Layer w10: R16.1 2799,4179.88 R18.1 v1(2770,4164.07) ; D6.1 4455,3971 5050,4566 5180,4566 5210,4596 J2.3
  Bottom Layer w10: v1@2770,4179.88 v1(2770,4164.07) ; D6.1 4179.06,3543 ; v1(2770,4164.07) 2770,3928.31 2876.31,3822 2929.57,3822 2953,3798.57 2953,3745.31 3144,3554.31 ; v1(2770,4164.07) 3144,3790.07 3144,3554.31 ; 3144,3554.31 3144,3480 3166,3458 3172.43,3458 ; 3144,3554.31 3155.31,3543 3155.31,3520.88 3149,3514.57 3149,3481.43 3172.43,3458 ; 3172.43,3458 3827.35,3458 ; 3827.35,3458 4094.06,3458 4179.06,3543 ; 3827.35,3458 3912.35,3543 4179.06,3543
NetD7_2: D7.2 D8.1 ZS1.2 | length 1188
  Top Layer w10: ZS1.2 6891.06,1151.06 D7.2
  Bottom Layer w10: D8.1 6419.98,1046 6786,1046 ZS1.2
NetD9_2: D9.2 D10.1 ZS1.1 | length 1642.8
  Top Layer w10: ZS1.1 6740,1868.94 D9.2
  Bottom Layer w10: D10.1 6156.02,1127 6563,1127 6590,1100 ZS1.1
NetJ1_6: J1.6 J1.7 J1.8 J1.9 | length 900
  Top Layer w10: J1.6 J1.7
  Bottom Layer w10: J1.9 J1.6 ; J1.8 J1.7
NetR6_1: R6.1 X1.1 | length 243.2
  Top Layer w10: X1.1 1799.73,3474.22 1810.95,3463 R6.1
NetR7_2: R7.2 X2.1 | length 1035.5
  Top Layer w10: X2.1 2214,4533.58 2214,4760 2263,4809 2337,4809 2405.87,4740.13 2405.87,4310.5 2339.37,4244 R7.2
NetR13_2: R13.2 U2.3 | length 747.5
  Top Layer w10: R13.2 2585.97,3454.53 2909.5,3131 2931.55,3131 2938.65,3123.9 2946,3123.9
OSC: U1.39 X1.3 | length 2337.9
  Top Layer w10: X1.3 2014.42,3661.42 2130,3777 v1(2130,3784) ; v1(3014,2586) 2996,2604 2996,2700 3055.2,2759.2 3175.33,2759.2 3254.53,2680 U1.39@3254.53,2639
  Bottom Layer w10: v1(2130,3784) 2130,3472 2129,3471 v1(3014,2586)
PGC: J5.1 U1.42 | length 3596.2
  Top Layer w10: v1(3098,2719) 3136.47,2719 3195.47,2660 U1.42@3195.47,2634 ; v1(3703,2080) v1(3968,1815)
  Bottom Layer w10: v1(3098,2719) 3137.05,2679.95 3137.05,2503.52 3149,2491.57 3149,2458.43 3105.57,2415 3100,2415 3039,2354 3039,2206.98 3060.98,2185 3680,2185 3703,2162 v1(3703,2080) ; 3799,1815 v1(3968,1815) ; J5.1 4510.47,1302.95 ; v1(3968,1815) 3998.43,1815 4510.47,1302.95 ; v1(3968,1815) 4480.05,1302.95 4510.47,1302.95
PGD: J5.2 U1.37 | length 2730.9
  Top Layer w10: U1.37 3293.9,2560.1 3303,2551 3303,2543 v1(3362,2484)
  Bottom Layer w10: v1(3362,2484) 3362,2448 3200,2286 3150,2286 3114,2322 3093,2322 3059,2288 3059,2237 3080,2216 4026,2216 4588,1654 4588,1390.17 J5.2
RBIAS: R1.2 U1.53 | length 2905
  Top Layer w10: R1.2 1796,1312.1 1796,1036 1820,1012 2562,1012 2630,1080 2630,2403.9 2680,2453.9 U1.53@2981,2453.9
RCAP: C13.2 U2.44 | length 333
  Top Layer w10: C13.2 3103.15,3388.79 3103.94,3388 U2.44
RIGHT: R16.2 U2.39 | length 3760.6
  Top Layer w10: R16.2 2700,4364 2649,4415 2649,4611 2662,4624 2740,4624 2751,4635 2751,4722 2651,4722 2609,4680 2609,3460 2853,3216 2960,3216 3031.03,3144.97 3236.97,3144.97 3330,3238 3330,3602 3280,3652 3230,3652 3219.54,3641.54 3219.54,3589.93 3249,3560.47 3249,3453.5 3202.36,3406.86 U2.39
SCK: U1.34 U2.28 U5.6 U6.6 | length 3159.5
  Top Layer w6.89: 4106.8,3337.2 U6.6
  Top Layer w10: U2.28 3333,3005.79 3343,2995.79 v1(3343,2908) ; U1.34@3352.95,2636 3352.95,2699.95 v1@3451.02,2798.02 ; v1(3452,2799) v1@3451.02,2798.02 ; 4106.8,3337.2 3978,3466 3814,3466 3451,3103 3451.02,2799 v1@3451.02,2798.02 ; U6.6 4312,3337.2 4359,3290.2 4359,2406 4280,2327 4200,2327 4149,2378 4149,2396.2 4160,2407.2 U5.6
  Bottom Layer w10: v1(3343,2908) v1(3452,2799)
SD_CD: J3.5 U1.16 | length 2115.2
  Top Layer w4.41: U1.16@3372.64,2151 U1.16
  Top Layer w10: J3.5 2990,1403.39 3025.39,1368 3229,1368 3246,1385 3593,1385 3666,1312 3920.08,1312 3920.08,1618.92 3388,2151 3386.17,2151 3372.95,2164.21 U1.16@3372.95,2164.53
SD_CS: J3.1 U1.2 | length 1281.7
  Top Layer w10: J3.1 2885.87,1560.87 2875,1550 2875,1450 2886,1439 3194,1439 3205,1450 3205,1925.05 3183.05,1947 3177.43,1947 3097.05,2027.38 U1.2
SD_DO: J3.4 U1.63 | length 893.4
  Top Layer w4.41: 3061,2219 3061,2246.05
  Top Layer w10: U1.63 3050,2257.05 3061,2246.05 ; 3061,2219 3054,2212 3054,1499.13 3071,1482.13 J3.4
SD_IN: J3.2 U1.1 | length 625.8
  Top Layer w4.41: U1.1@3077,2127.64 U1.1@3077.36,2128
  Top Layer w10: U1.1@3077,2127.64 3077,1991 3129,1939 3129,1560.87 J3.2 ; U1.1@3077.36,2128 U1.1
SD_SCK: J3.3 U1.64 | length 834.7
  Top Layer w10: J3.3 3026,1482.13 3026,1596 3004,1618 3004,2223 3004.53,2223.53 3004.53,2232
SD_WD: J3.6 U1.15 | length 1245.4
  Top Layer w10: J3.6 3200.5,1403.39 3269,1471.89 v1(3269,1494) ; U1.15 3352.95,2048.05 3370,2031 3370,2010.95 v1(3510,1870.95)
  Bottom Layer w10: v1(3269,1494) 3510,1735 v1(3510,1870.95) ; 3269,1612 3315,1612 3438,1735
SI: U1.36 U2.29 U5.5 U6.5 | length 2908.9
  Top Layer w3.94: v1@3391,2960 3391,2977.47
  Top Layer w10: U2.29 3343,3025.47 3391,2977.47 ; U1.36@3313.58,2629 3313.58,2741.58 3391,2819 3391,2960 v1(3411,2960) ; v1(4003,2672) 4225,2672 4280,2727 4280,2881 4339,2940 ; U6.5 4247.39,3311.61 4339,3220 4339,2940 ; U5.5 4260,2381.61 4339,2460.61 4339,2940
  Bottom Layer w10: v1(3411,2960) 3699,2672 v1(4003,2672)
SO: U2.30 U5.2 | length 1389.6
  Top Layer w6.89: 3940,2432.79 U5.2
  Top Layer w10: U2.30 3364.87,3045.16 3513,3193.29 v1(3513,3227) ; 3940,2432.79 3920,2452.79 3920,2650 v1(4005,2735)
  Bottom Layer w10: v1(3513,3227) v1(4005,2735)
SO1: U1.35 U6.2 | length 1234.2
  Top Layer w10: U1.35 3333.27,2565.73 3333.55,2565.45 3333.55,2560.5 3344.91,2549.13 3349.87,2549.13 3357,2542 3390.46,2542 3400.5,2552.04 3402.04,2552.04 3721,2871 3721,3305 3778.79,3362.79 U6.2
SW1: J1.1 R2.1 U1.17 | length 3982.3
  Top Layer w10: U1.17 3617.36,2237.36 v1(3669,2289) ; R2.1 4930.47,1835 4901.38,1805.9 4730.75,1805.9 4730.75,2635.75 4756,2661 4935,2661 4956,2640 4956,2579 J1.1
  Bottom Layer w10: v1(3669,2289) 3702,2289 4019.4,2606.4 4263.95,2606.4 4302.35,2568 ; 3692,2219 3714.56,2241.56 3737.56,2241.56 3759.69,2263.69 3759.69,2286.69 3782.25,2309.25 3782.25,2329.25 3942.75,2489.75 3962.75,2489.75 4053,2580 4226.57,2580 4238.57,2568 4302.35,2568 ; J1.1 4967,2568 4302.35,2568
SW2: J1.2 R3.2 | length 874.4
  Top Layer w10: J1.2 5056,2579 5056,2105 5239.53,1921.47 R3.2
SW3: J1.3 R4.2 | length 845.8
  Top Layer w10: R4.2 4759.53,1955 4874,2069.47 4874,2579 J1.3
TEST: R11.2 U2.32 | length 1270.1
  Top Layer w10: R11.2 3247.53,3819.53 3308,3880 3378,3880 3418,3840 3418,3134.53 3368,3084.53 U2.32
TPIN+: C32.4 R20.2 U1.47 | length 4037
  Top Layer w10: C32.4 1323.9,2075.9 1528,2280 1528,2400 1518,2410 R20.2 ; U1.47@3097.05,2564.74 U1.47 ; 3099.42,2558.41 3100,2557.83 3100,2540 3109,2531 v1(3109,2475)
  Bottom Layer w10: C32.4 1884.21,2435 ; 3097.05,2435 1884.21,2435 ; v1(3109,2475) 1924.21,2475 1884.21,2435
TPIN-: C32.5 R19.2 U1.46 | length 2980.5
  Top Layer w10: C32.5 1243.98,2164.02 1205,2203 1205,2400 1215,2410 R19.2 ; v1(3036,2682) 3039,2679 3101,2679 3116.73,2663.27 U1.46@3116.73,2627
  Bottom Layer w10: C32.5 1903.29,2534 3040,2534 3096,2590 3096,2622 v1(3036,2682)
TPOUT+: C32.2 R22.2 U1.51 | length 2297.8
  Top Layer w10: C32.2 1531.42,1827 1860,1827 1886,1853 1886,1900 1866,1920 1806,1920 1796,1930 1796,2019 2187,2410 ; R22.2 2187,2410 ; U1.51 2645.73,2493.27 2610,2529 2306,2529 2187,2410
TPOUT-: C32.3 R21.2 U1.50 | length 2132.7
  Top Layer w10: C32.3 1403.82,1951.82 1563,2111 1563,2360 1613,2410 R21.2 1740,2453 1862,2575 2877,2575 2939.05,2512.95 U1.50
VS_CLK: U2.18 X2.3 | length 2736.1
  Top Layer w10: X2.3 2385.87,4606.42 2385.87,4402 2310,4326.13 2310,4144 2459,3995 v1(2459,3555) ; U2.18 3123.62,2923.62 3126,2926 3255,2926 3276,2905 v1(3276,2836)
  Bottom Layer w10: v1(2459,3555) 2459,3272 2858,2873 3222,2873 3263,2832 3267,2836 v1(3276,2836)
VS_CS: U1.5 U2.23 | length 750.5
  Top Layer w10: U1.5 3156.1,2314.1 v1(3174,2332) ; v1(3202.05,2793) 3222.05,2813 U2.23
  Bottom Layer w10: v1(3174,2332) 3202.05,2360.05 v1(3202.05,2793)
xDCS: U1.4 U2.13 | length 997.6
  Top Layer w10: v1(2933,2772) 2933,2799 3025.2,2891.2 U2.13 ; U1.4 3136.42,2392.42 3138.84,2390 v1(3145,2390)
  Bottom Layer w10: v1(2933,2772) 3120,2772 3157.05,2734.95 3157.05,2511.8 3169,2499.85 3169,2450.15 3157.05,2438.2 3157.05,2413.05 3145,2401 v1(3145,2390)
pads on no net: C32. C32.6 D5.2 J2.1 J2.10 J2.MH1 J2.MH2 J3.7 J3.8 J4.4 J4.5 J4.6 J4.8 U1.6 U1.8 U1.18 U1.21 U1.22 U1.27 U1.28 U1.29 U1.30 U1.31 U1.32 U1.33 U1.40 U1.43 U1.44 U1.58 U1.59 U1.60 U2.1 U2.2 U2.5 U2.7 U2.11 U2.12 U2.15 U2.17 U2.24 U2.25 U2.27 U2.31 U2.35 U2.36 U2.48 U5.3 U6.3

## Polygon pours and split planes (outlines as drawn)
AGND on Bottom Layer "Bottom Layer-No Net" (solid, pour order 2): 1000,5000 1000,1000 7000,1000 7000,5000
AGND on Top Layer "Top Layer-No Net" (solid, pour order 0): 1000,5000 1000,1000 7000,1000 7000,5000

## Text inside footprints (layer, text, board x,y; h text height)
C22: Top Overlay "+" at 1880.15,4345.99 h59.06
C23: Top Overlay "+" at 6750.15,4355.99 h59.06
C24: Top Overlay "+" at 6284.74,2060.99 h59.06
C29: Top Overlay "+" at 2720.15,1310.99 h59.06
C33: Top Overlay "+" at 6284.74,3450.99 h59.06
J1: Top Overlay "1" at 4995.31,2539.68 h49.6 r90; Top Overlay "2" at 4995.31,2640 h49.6 r90; Top Overlay "3" at 4895,2640 h49.6 r90; Top Overlay "4" at 4895,2539.68 h49.6 r90